# EAGLE board 4BitCounter (EAGLE 7.6.0)

Size 48 x 41.5 mm. Coordinates in mm from the lower left corner, seen from the top.
Outline: 0,0 48,0 48,41.5 0,41.5 0,0
Copper layers (1*16): Top 0.035mm / dielectric 1.5mm / Bottom 0.035mm
Design rules "default": minimum track width 10mil, minimum drill 24mil, track to track 8mil, track to pad 8mil, pad to pad 8mil, via to via 8mil, smd to smd 8mil, copper to edge 40mil, drill to drill 8mil, minimum pad ring 10mil, minimum via ring 8mil, stop-mask expansion 4mil, vias tented up to drill 0mil, thermal gap 10mil

## Footprints (pad centres in the part's own frame; a part is rotated, then mirrored left to right if it is on the bottom)
DIL14 = drill 0.813 long: 1 -7.62,-3.81; 2 -5.08,-3.81; 3 -2.54,-3.81; 4 0,-3.81; 5 2.54,-3.81; 6 5.08,-3.81; 7 7.62,-3.81; 8 7.62,3.81; 9 5.08,3.81; 10 2.54,3.81; 11 0,3.81; 12 -2.54,3.81; 13 -5.08,3.81; 14 -7.62,3.81
1X10-BIG = drill 1.016 pad 1.778 octagon: 1 -11.43,0; 2 -8.89,0; 3 -6.35,0; 4 -3.81,0; 5 -1.27,0; 6 1.27,0; 7 3.81,0; 8 6.35,0; 9 8.89,0; 10 11.43,0
1X04 = drill 1.016 long: 1 -3.81,0; 2 -1.27,0; 3 1.27,0; 4 3.81,0
1206 = smd 1.6 x 1.803: A -1.422,0; C 1.422,0
B3F-10XX = drill 1.016 long: 1 -3.251,2.261; 2 3.251,2.261; 3 -3.251,-2.261; 4 3.251,-2.261
SIP10 = drill 0.6 long: 1 -11.46,0; 2 -8.92,0; 3 -6.38,0; 4 -3.84,0; 5 -1.3,0; 6 1.24,0; 7 3.78,0; 8 6.32,0; 9 8.86,0; 10 11.4,0
SOLDERJUMPER_REFLOW = smd 1.168 x 1.6: 1 -0.762,0; 2 0.762,0

## Placement (x,y rotation side)
74LS293  74LS293N  [DIL14]  24.5,16 0 top
BITS_OUT  PINHD-1X10  [1X10-BIG]  13.5,40 180 top
JP_CLOCK_IN  [1X04]  23.5,2.2 0 top
JP_CLOCK_OUT  [1X04]  46,22 90 top
LED_BIT0  [1206]  30.5,37 90 top
LED_BIT1  [1206]  35.5,37 90 top
LED_BIT2  [1206]  40.5,37 90 top
LED_BIT3  [1206]  45.5,37 90 top
RESET_SWITCH  [B3F-10XX]  41,7 180 top
RN_300O  [SIP10]  24,26.5 0 top
SJ_OUTPUT  [SOLDERJUMPER_REFLOW]  6,2.3 0 top
SJ_OUTPUT_R  [SOLDERJUMPER_REFLOW]  6,7.3 0 top

## Library data of the parts
74LS293 = 74xx-eu
BITS_OUT LED_BIT0 LED_BIT1-LED_BIT3 = adafruit
JP_CLOCK_IN JP_CLOCK_OUT = pinhead
RESET_SWITCH = switch-omron; MPN: B3F-1000; OC_FARNELL: 176432; OC_NEWARK: 36M3542
RN_300O = resistor-sip
SJ_OUTPUT SJ_OUTPUT_R = microbuilder

## Nets
BIT0: 74LS293.9 74LS293.11 BITS_OUT.4 LED_BIT0.A
BIT1: 74LS293.5 BITS_OUT.3 LED_BIT1.A
BIT2: 74LS293.4 BITS_OUT.2 LED_BIT2.A
BIT3: 74LS293.8 BITS_OUT.1 LED_BIT3.A
GND: 74LS293.7 BITS_OUT.10 JP_CLOCK_IN.1 JP_CLOCK_OUT.1 RN_300O.1
MASTER_CLOCK_A: 74LS293.10 SJ_OUTPUT.1 SJ_OUTPUT_R.1
N$1: LED_BIT1.C RN_300O.8
N$2: LED_BIT0.C RN_300O.7
N$3: LED_BIT2.C RN_300O.9
N$4: LED_BIT3.C RN_300O.10
RESET: 74LS293.12 74LS293.13 RESET_SWITCH.4 RN_300O.6
TMR555_OUTPUT: JP_CLOCK_IN.3 JP_CLOCK_OUT.3 SJ_OUTPUT.2
TMR555_OUTPUT_REVERSE: JP_CLOCK_IN.4 JP_CLOCK_OUT.4 SJ_OUTPUT_R.2
VCC: 74LS293.14 BITS_OUT.9 JP_CLOCK_IN.2 JP_CLOCK_OUT.2 RESET_SWITCH.1

## Tracks (layer width: path | path; a pad name or v marks a point on that pad's centre or on a via)
BIT0  (3 unrouted)
BIT1  (2 unrouted)
BIT2  (2 unrouted)
BIT3  (2 unrouted)
GND  (4 unrouted)
MASTER_CLOCK_A  (2 unrouted)
N$1  (1 unrouted)
N$2  (1 unrouted)
N$3  (1 unrouted)
N$4  (1 unrouted)
RESET  (3 unrouted)
TMR555_OUTPUT  (2 unrouted)
TMR555_OUTPUT_REVERSE  (2 unrouted)
VCC  (4 unrouted)

## Text on the board
tNames: GND | VCC | B0 | B1 | B2 | B3 | + | GND | OUT_R | 4 Bit Counters | 4 Bit Counters | OUT | VCC | VCC | GND | GND | GND | VCC | OUT | OUT_R
bNames: MadeInTheUSB.net | PCBv2 - 2017.08